# Altium PCB NTC_Head.PcbDoc
Units mm, origin at the board's own origin, x right, y up, seen from the top; angles counter-clockwise.
Board outline 13.5 x 10 mm, 2 copper layers (Top Layer, Bottom Layer); 13 components, 13 nets, 32 pads, 19 vias.
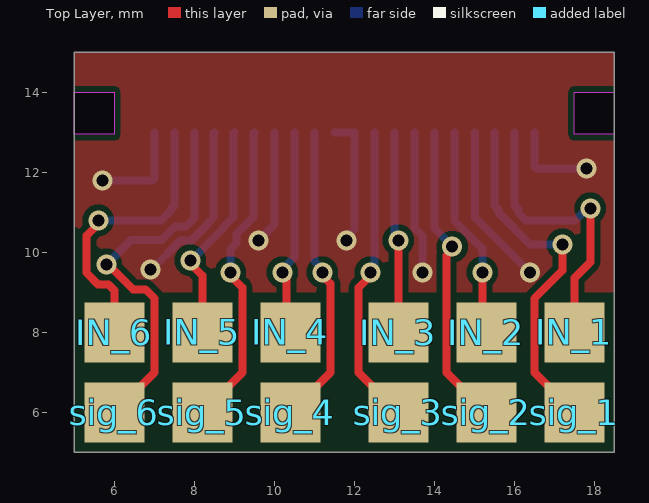
[diagram p0: Top Layer view]
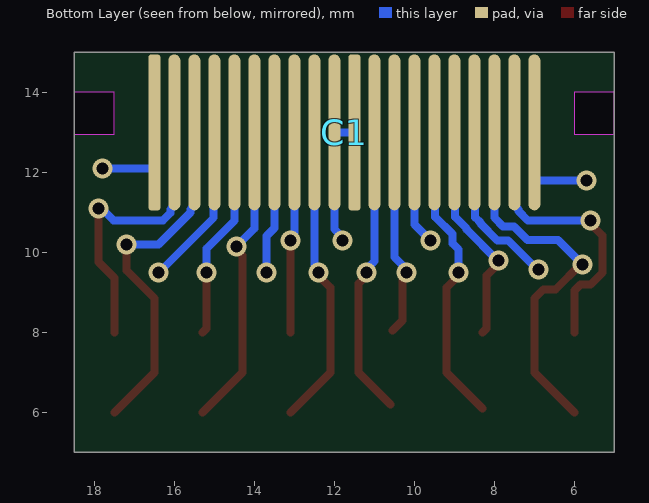
[diagram p1: Bottom Layer view, seen from below]

## Layer stack, top to bottom
Top Solder Mask: solder mask 0.0102, Solder Resist, Dk 3.5
Top Layer: signal copper 0.035
Dielectric 1: dielectric 0.32, FR-4, Dk 4.8
Bottom Layer: signal copper 0.035
Bottom Solder Mask: solder mask 0.0102, Solder Resist, Dk 3.5

## Board outline
5,5 5,15 18.5,15 18.5,5
cut-out: 17.5,14 18.5,14 18.5,12.95 17.5,12.95
cut-out: 5,14 6,14 6,12.95 5,12.95

## Design rules (kind name [scope] priority, off if disabled: settings)
Clearance [All] p1: gap=0.15 ignorepadtopadclearanceinfootprint=FALSE except(0: Arc-Hole Track-Hole SMDPad-Hole THPad-Hole Via-Hole Fill-Hole Poly-Hole Region-Hole Text-Hole)
ComponentClearance [All] p1 off: gap=0.254 collisioncheckmode=3 verticalgap=0.254 showdistances=FALSE
HoleSize [All] p1: absolutevalues=TRUE maxlimit=6.3 minlimit=0.3 maxpercent=80.000 minpercent=20.000
HoleToHoleClearance [All] p1: gap=0.45 allowstackedmicrovias=TRUE
PolygonConnect [All] p1: connectstyle=Relief reliefconductorwidth=0.25 reliefentries=4 polygonreliefangle="90 Angle" airgapwidth=0.25
RoutingVias [All] p1: holewidth=0.5 width=1 viastyle="Through Hole" minholewidth=0.3 minwidth=0.45 maxholewidth=6.3 maxwidth=10
SolderMaskExpansion [All] p1: expansion=0.102 istentingtop=FALSE
Width [All] p1: maxlimit=5 minlimit=0.15 preferedwidth=0.25 minimp=50.000000 maximp=50.000000 favimp=50.000000
27 further rules are at their usual default settings.

## Components (designator, comment, footprint, x,y, rotation, side; value= is the part's Value field where it differs from the comment)
C1 "20Pin Molex FPC" "Molex 20 Pin FPC" 5,9 r0 top
IN_1 "Pad" Generic_Pad_1.5x1.5 17.5,8 r90 top
IN_2 "Pad" Generic_Pad_1.5x1.5 15.3,8 r90 top
IN_3 "Pad" Generic_Pad_1.5x1.5 13.1,8 r90 top
IN_4 "Pad" Generic_Pad_1.5x1.5 10.4,8 r90 top
IN_5 "Pad" Generic_Pad_1.5x1.5 8.2,8 r90 top
IN_6 "Pad" Generic_Pad_1.5x1.5 6,8 r90 top
sig_1 "Pad" Generic_Pad_1.5x1.5 17.5,6 r90 top
sig_2 "Pad" Generic_Pad_1.5x1.5 15.3,6 r90 top
sig_3 "Pad" Generic_Pad_1.5x1.5 13.1,6 r90 top
sig_4 "Pad" Generic_Pad_1.5x1.5 10.4,6 r90 top
sig_5 "Pad" Generic_Pad_1.5x1.5 8.2,6 r90 top
sig_6 "Pad" Generic_Pad_1.5x1.5 6,6 r90 top

## Footprints (in the part's own frame and the unit in brackets; to place one, negate y for a bottom-side part, rotate by r counter-clockwise, add the part's x,y. Pads: shape width x height; smd on the part's side, far side on the other; paste and mask are expansions set on the pad)
Generic_Pad_1.5x1.5 [mm] "1.5mm x 1.5mm Pad"
  rect 1.5x1.5 smd: P(0,0)
"Molex 20 Pin FPC" [mm]
  rrect50% 0.3x3.9 smd far side: 1(11.5,4) 11(6.5,4)
  oval 0.3x3.9 smd far side: 2(11,4) 3(10.5,4) 4(10,4) 5(9.5,4) 6(9,4) 7(8.5,4) 8(8,4) 9(7.5,4) 10(7,4) 12(6,4) 13(5.5,4) 14(5,4) 15(4.5,4) 16(4,4) 17(3.5,4) 18(3,4) 19(2.5,4) 20(2,4)

## Part data
C1: "Flex PCB part for the Molex 20pin FCC"
IN_1 IN_2 IN_3 IN_4 IN_5 IN_6 sig_1 sig_2 sig_3 sig_4 sig_5 sig_6: library part Generic_Pad_1.5x1.5, "Pad 1.5mm x 1.5mm"

## Via types
v1: diameter 0.5, hole 0.3, Top Layer to Bottom Layer, 19 vias

## Nets (pads, with @x,y where several pads share a name; then routed paths per layer and width w, separated by ;. In a path a pad name is that pad's centre, name@x,y a point inside that pad or via, vN(x,y) a via of type N, cw(c..) or ccw(c..) an arc to the next point about the centre after c; other vN are vias at no path point)
GND: C1.1 C1.4 C1.7 C1.10 C1.11 C1.14 C1.17 C1.20 | length 22.7
  Bottom Layer w0.2: v1(5.7,11.8) 6.954,11.8 7,11.846 C1.20 ; v1(6.9,9.577) 6.933,9.577 7.656,10.3 7.928,10.3 8.35,10.722 8.35,10.747 8.481,10.878 8.481,12.981 C1.17 ; v1(9.6,10.3) 10,10.7 C1.14 ; C1.11 C1.10 12,10.581 11.8,10.381 v1(11.8,10.3) ; C1.7 13.5,10.607 13.7,10.407 v1(13.7,9.5) ; C1.4 15.019,12.981 15.019,10.869 v1(16.394,9.494) ; C1.1 16.5,12.15 16.55,12.1 v1(17.8,12.1)
IN_1: C1.2 IN_1.P | length 7.3
  Top Layer w0.2: IN_1.P 17.5,9.359 17.9,9.759 v1(17.9,11.1)
  Bottom Layer w0.2: C1.2 16,11.173 16.1,11.073 16.1,10.99 16.29,10.8 17.519,10.8 17.819,11.1 v1(17.9,11.1)
IN_2: C1.5 IN_2.P | length 5.3
  Top Layer w0.2: v1(15.2,9.5) 15.2,8.1 IN_2.P
  Bottom Layer w0.2: C1.5 14.5,10.792 15.2,10.092 v1(15.2,9.5)
IN_3: C1.8 IN_3.P | length 5
  Top Layer w0.2: IN_3.P v1(13.1,10.3)
  Bottom Layer w0.2: C1.8 13,10.481 13.1,10.381 v1(13.1,10.3)
IN_4: C1.13 IN_4.P | length 5.2
  Top Layer w0.2: v1(10.2,9.5) 10.2,9.419 10.3,9.319 10.3,8.3 IN_4.P@10.55,8.05
  Bottom Layer w0.2: v1(10.2,9.5) 10.2,9.581 10.5,9.881 C1.13
IN_5: C1.16 IN_5.P | length 5.6
  Top Layer w0.2: v1(7.9,9.8) 7.9,9.719 8.2,9.419 8.2,8.1 IN_5.P@8.3,8
  Bottom Layer w0.2: v1(7.9,9.8) 7.923,9.8 8.7,10.577 8.7,10.602 8.981,10.883 8.981,12.981 C1.16
IN_6: C1.19 IN_6.P | length 7.3
  Top Layer w0.2: v1(5.6,10.8) 5.6,10.719 5.3,10.419 5.3,9.493 5.593,9.2 5.85,9.2 6,9.05 IN_6.P
  Bottom Layer w0.2: v1(5.6,10.8) 7.166,10.8 7.4,11.034 7.4,11.073 7.5,11.173 C1.19
sig_1: C1.3 sig_1.P | length 8.9
  Top Layer w0.2: v1(17.2,10.2) 17.2,9.554 16.5,8.854 16.5,7 sig_1.P
  Bottom Layer w0.2: C1.3 15.5,11.173 15.6,11.073 15.6,10.995 16.395,10.2 v1(17.2,10.2)
sig_2: C1.6 sig_2.P | length 7.7
  Top Layer w0.2: v1(14.443,10.143) 14.443,10.061 14.3,9.919 14.3,7 sig_2.P
  Bottom Layer w0.2: C1.6 14,10.602 14.443,10.159 v1(14.443,10.143)
sig_3: C1.9 sig_3.P | length 7.6
  Top Layer w0.2: v1(12.4,9.5) 12.4,9.419 12.1,9.119 12.1,7 sig_3.P
  Bottom Layer w0.2: v1(12.4,9.5) 12.4,9.581 12.5,9.681 C1.9
sig_4: C1.12 sig_4.P | length 7.3
  Top Layer w0.2: sig_4.P@10.6,6.2 11.4,7 11.4,9.219 11.2,9.419 v1(11.2,9.5)
  Bottom Layer w0.2: C1.12 11,9.781 11.2,9.581 v1(11.2,9.5)
sig_5: C1.15 sig_5.P | length 7.6
  Top Layer w0.2: sig_5.P@8.3,6.1 9.2,7 9.2,9.119 8.9,9.419 v1(8.9,9.5)
  Bottom Layer w0.2: v1(8.9,9.5) 8.9,10.077 9.05,10.227 9.05,10.457 9.481,10.888 9.481,12.981 C1.15
sig_6: C1.18 sig_6.P | length 9.6
  Top Layer w0.2: v1(5.8,9.7) 5.845,9.7 6.468,9.077 6.776,9.077 7,8.854 7,7 sig_6.P
  Bottom Layer w0.2: v1(5.8,9.7) 6.412,10.312 7.173,10.312 7.511,10.65 7.783,10.65 8,10.867 C1.18

## Polygon pours and split planes (outlines as drawn)
GND on Top Layer "NONET_L01_P-001" (solid, remove dead copper, pour order 0): 5,15 18.5,15 18.5,9 5,9
no net on Top Solder Mask "NONET_L01_P-001" (solid): 6.5,15 17,15 17,11.5 6.5,11.5

## Silkscreen, mask and mechanical layers (free items; w line width, h text height)
Board Outline:
  lines w0.1: 18.5,9 18.5,5 ; 5,9 5,5 18.5,5 ; 5,9 5,9 ; 18.5,5 18.5,5